# Altium PCB KeeWatch.PcbDoc (part 1 of 2)
Units mm, origin at the board's own origin, x right, y up, seen from the top; angles counter-clockwise.
Board outline 34.5 x 38.7 mm, 4 copper layers (Top Layer, Signal Layer 1, Signal Layer 2, Bottom Layer), stack 1.641 mm thick; 86 components, 93 nets, 417 pads, 196 vias.
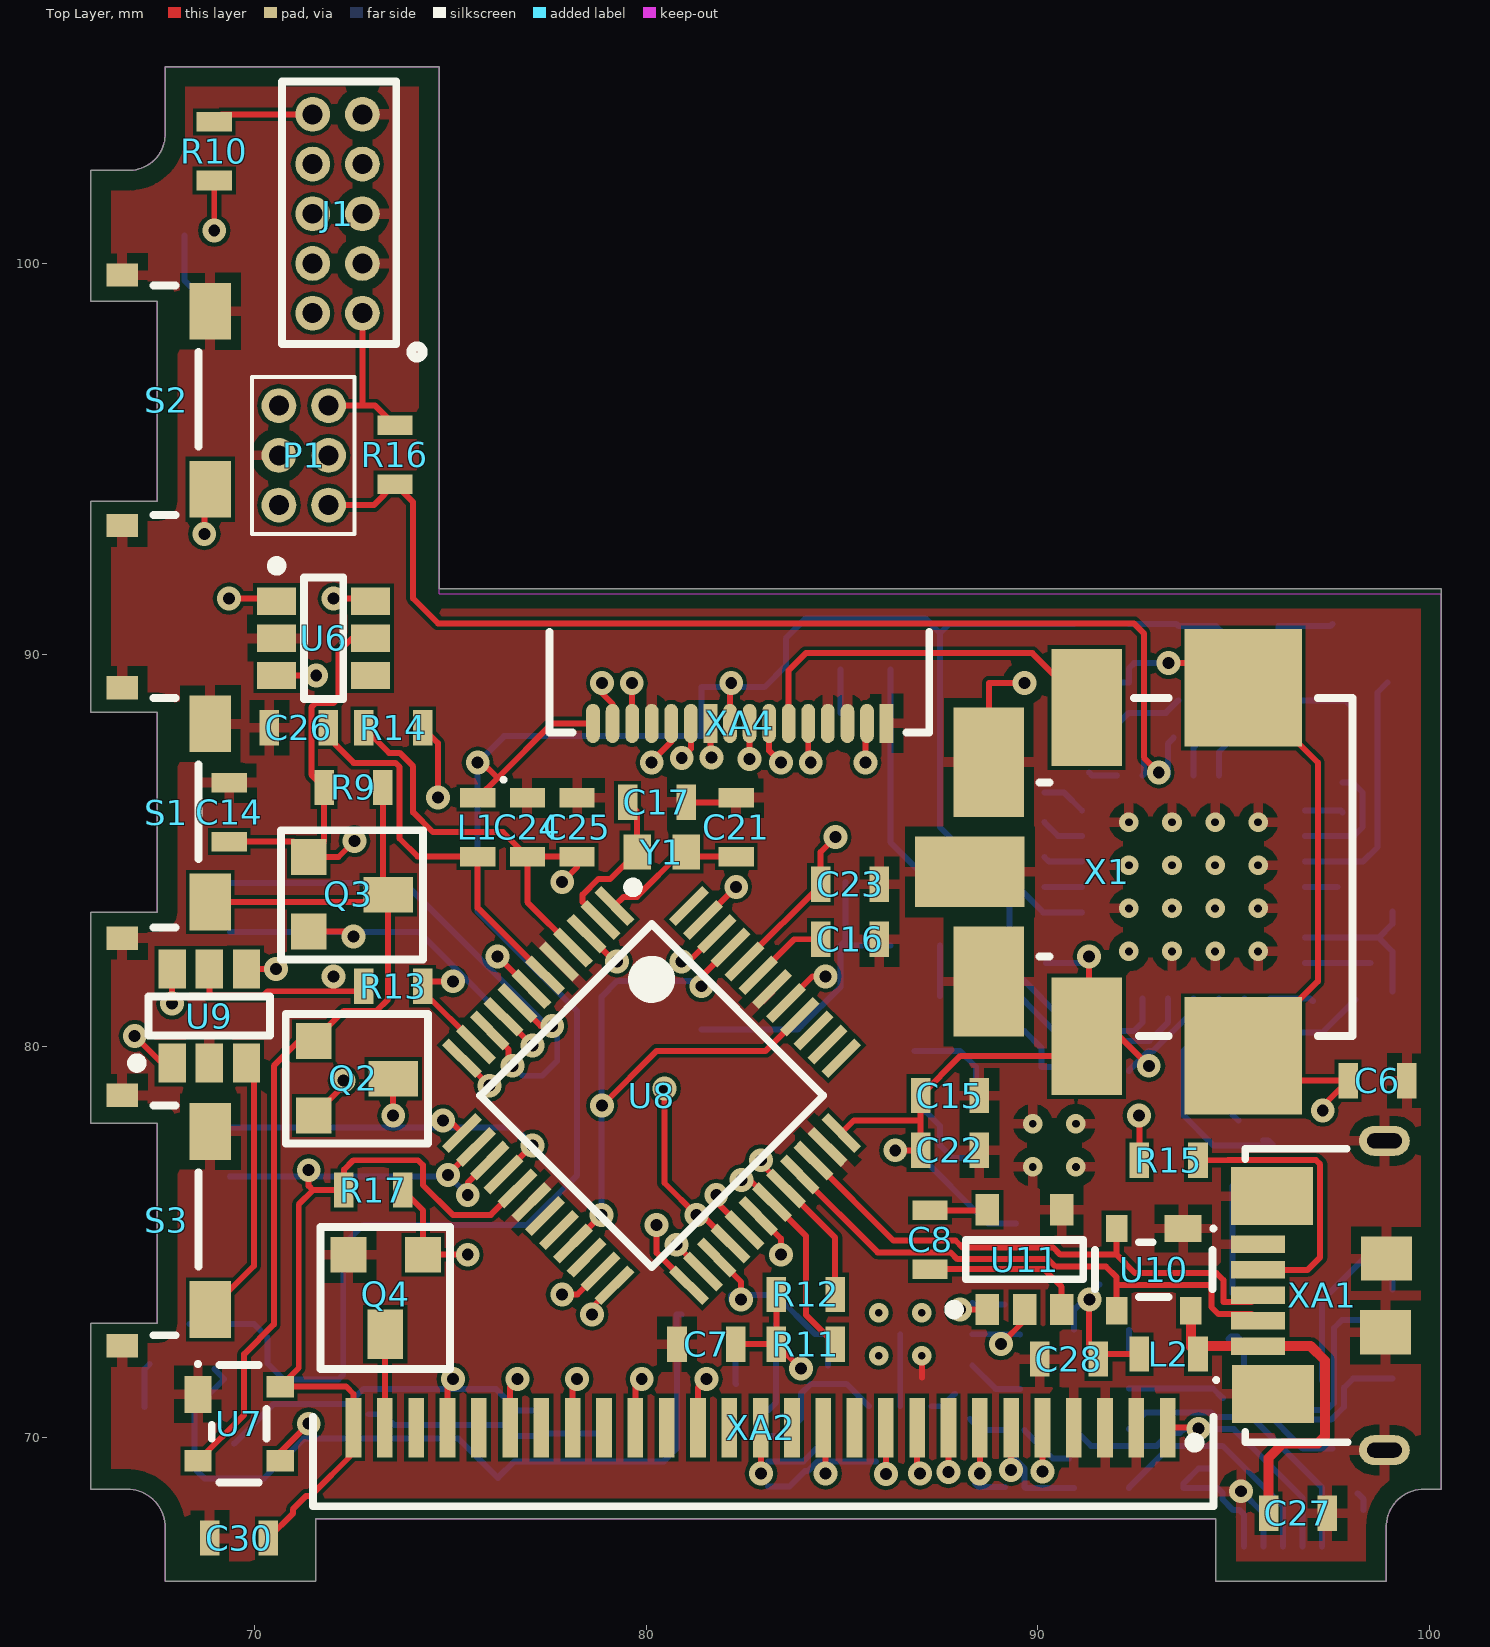
[diagram p0: Top Layer view]
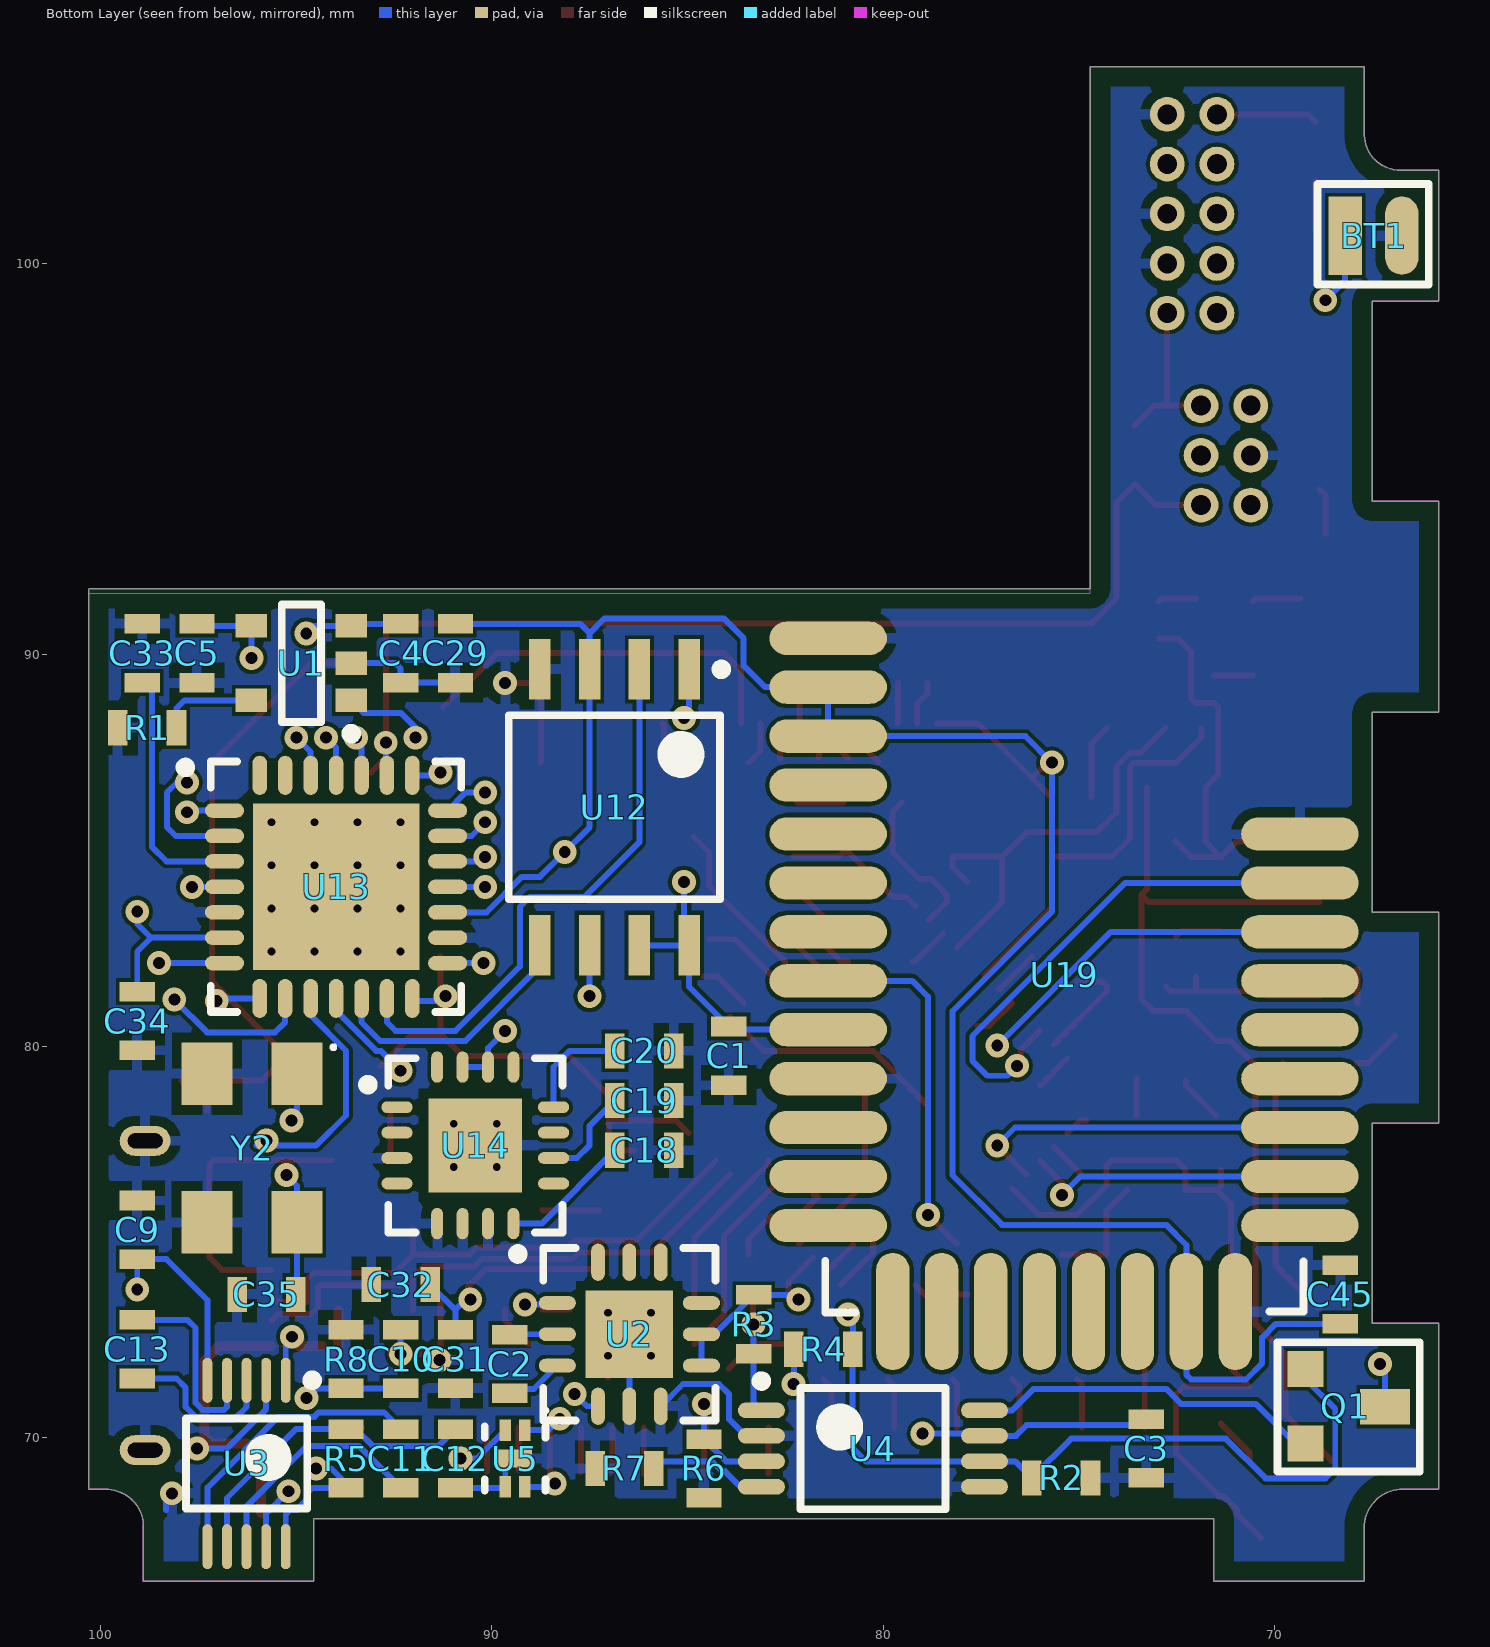
[diagram p1: Bottom Layer view, seen from below]
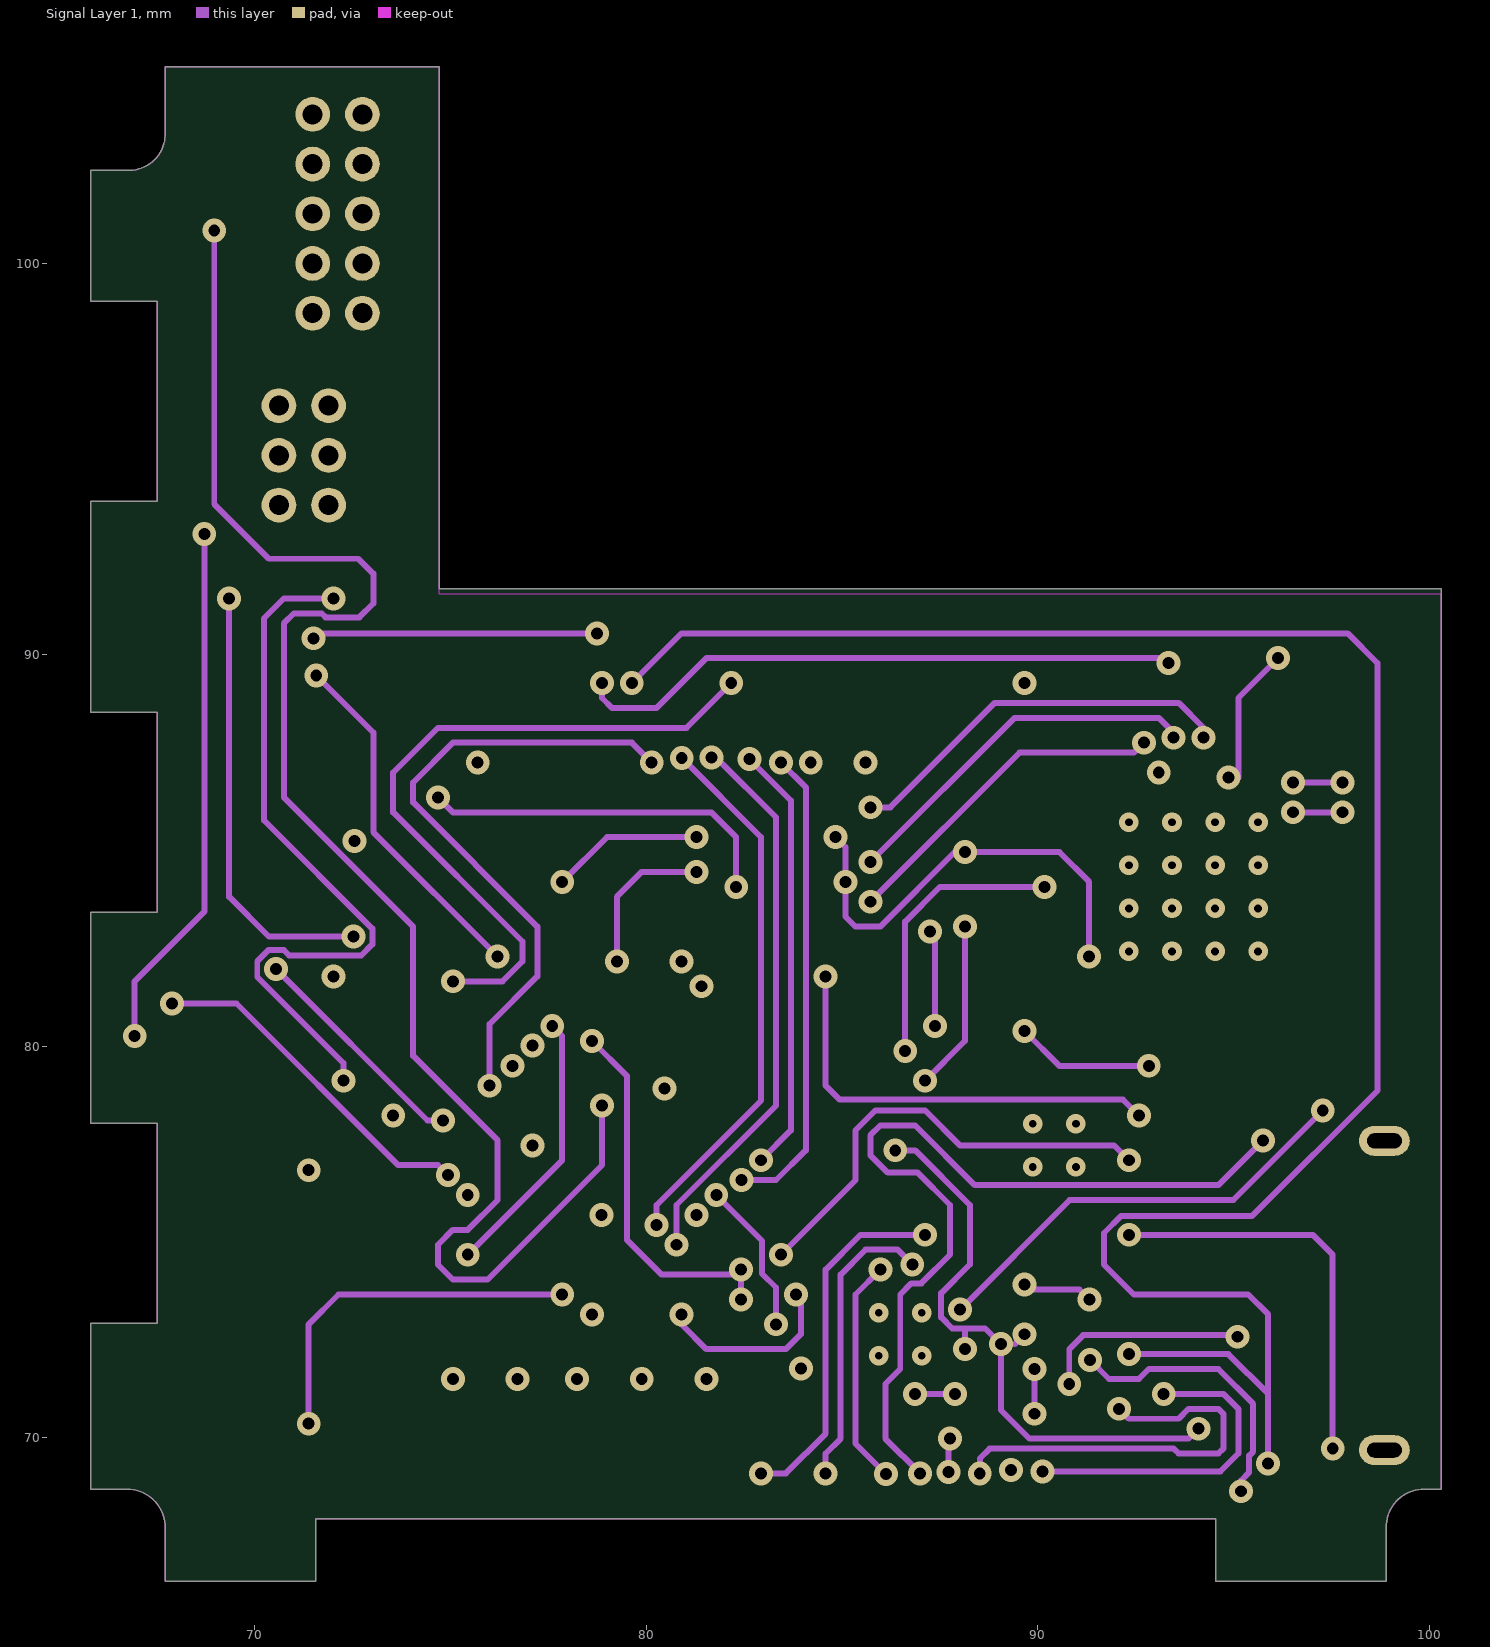
[diagram p2: Signal Layer 1]
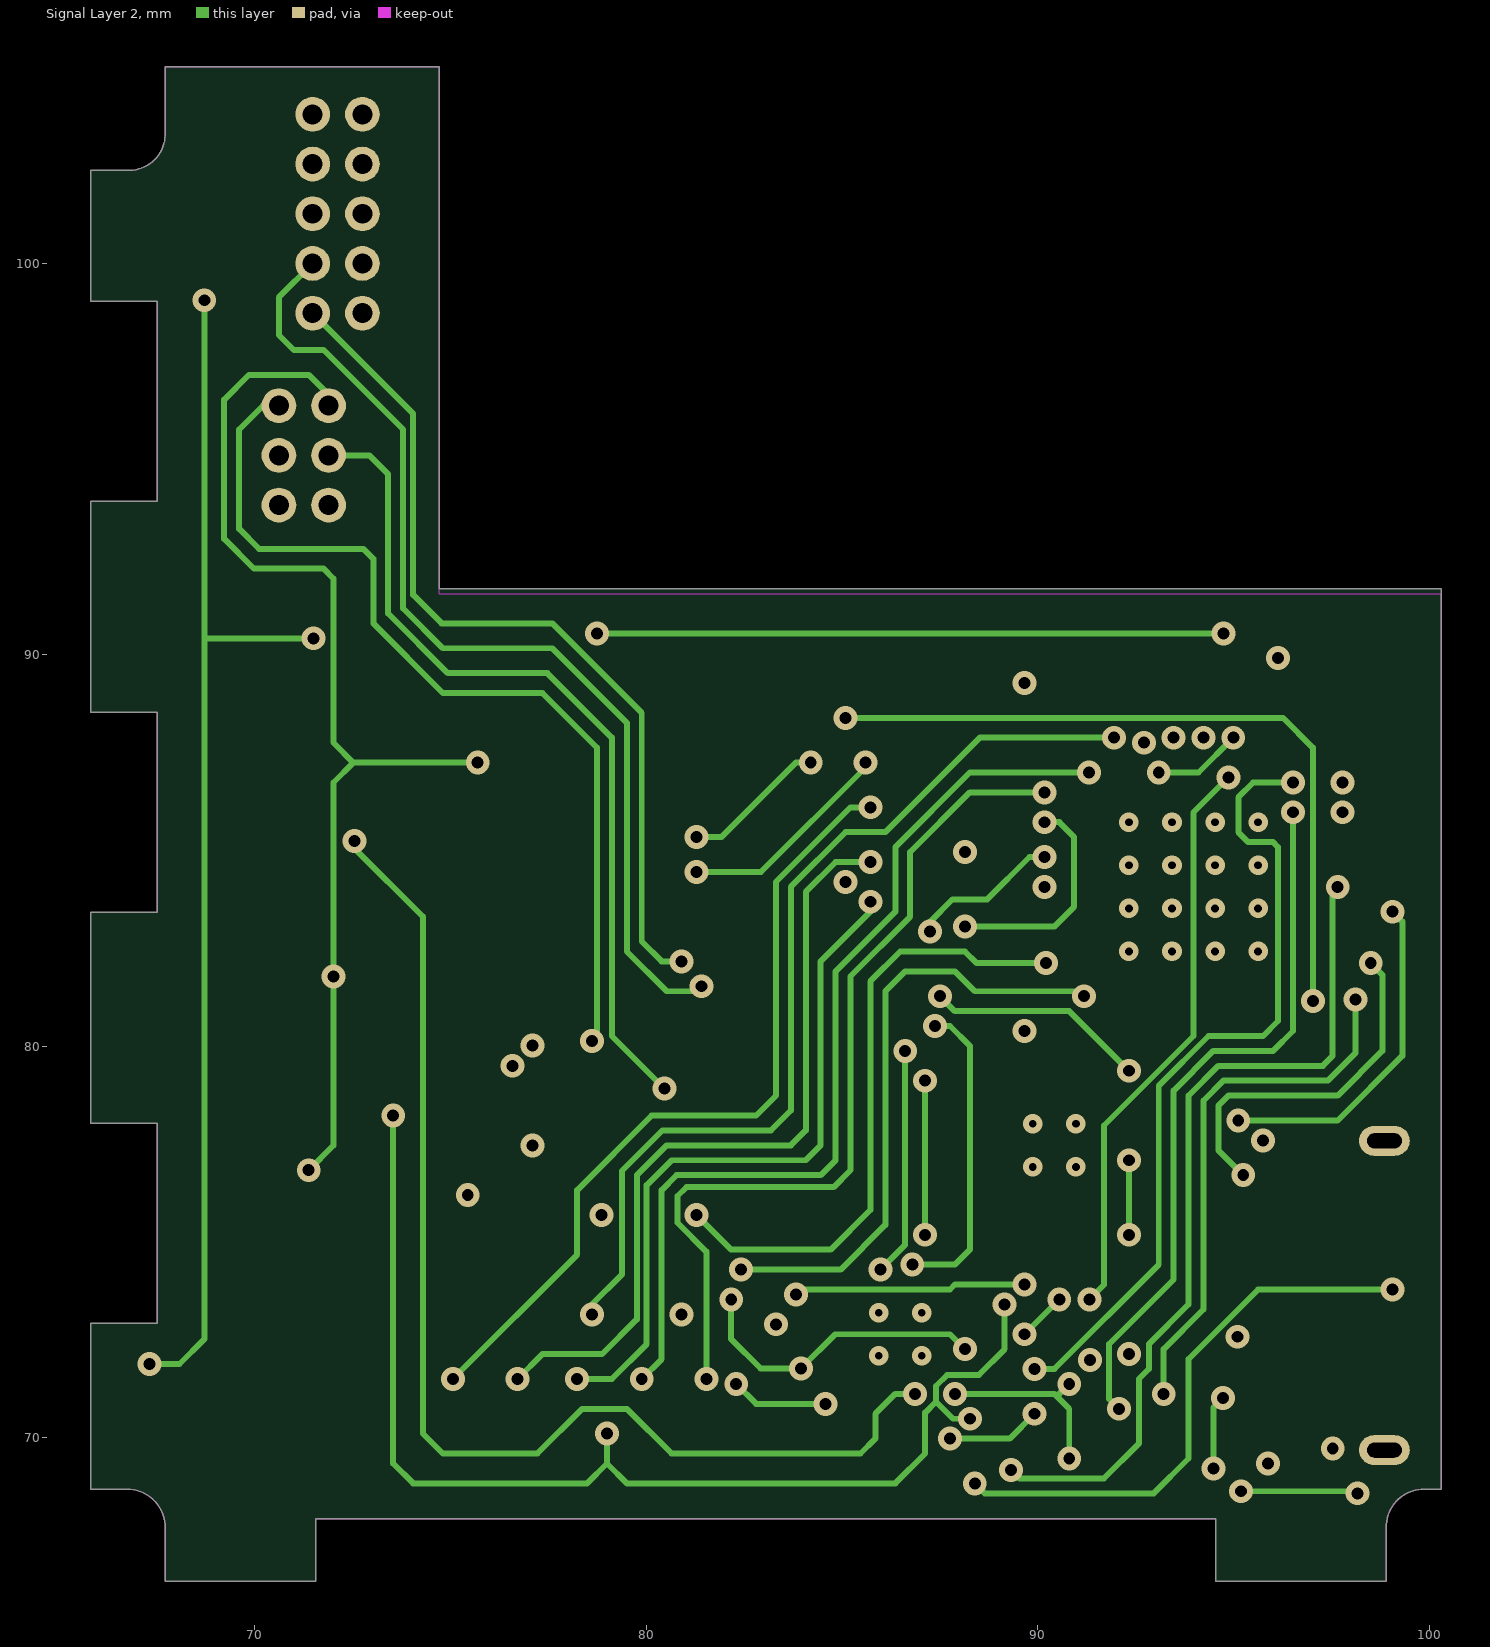
[diagram p3: Signal Layer 2]
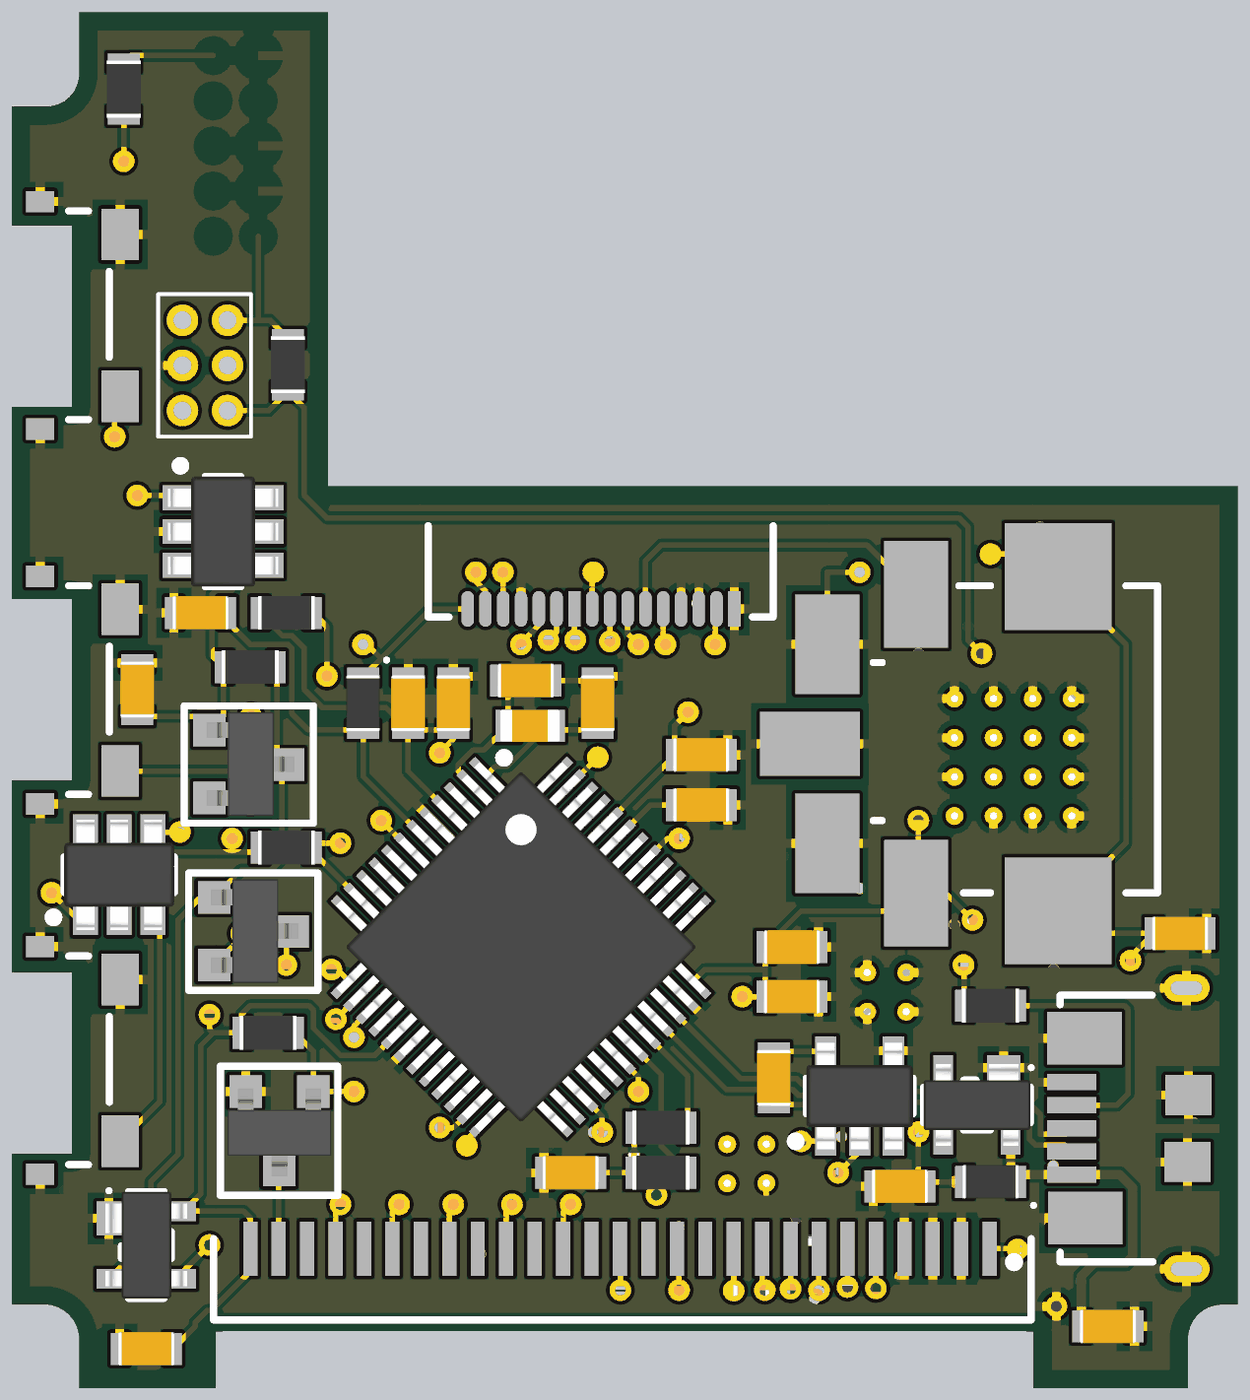
[diagram p5: 3D render of the assembled board from above, using the file's embedded part models]
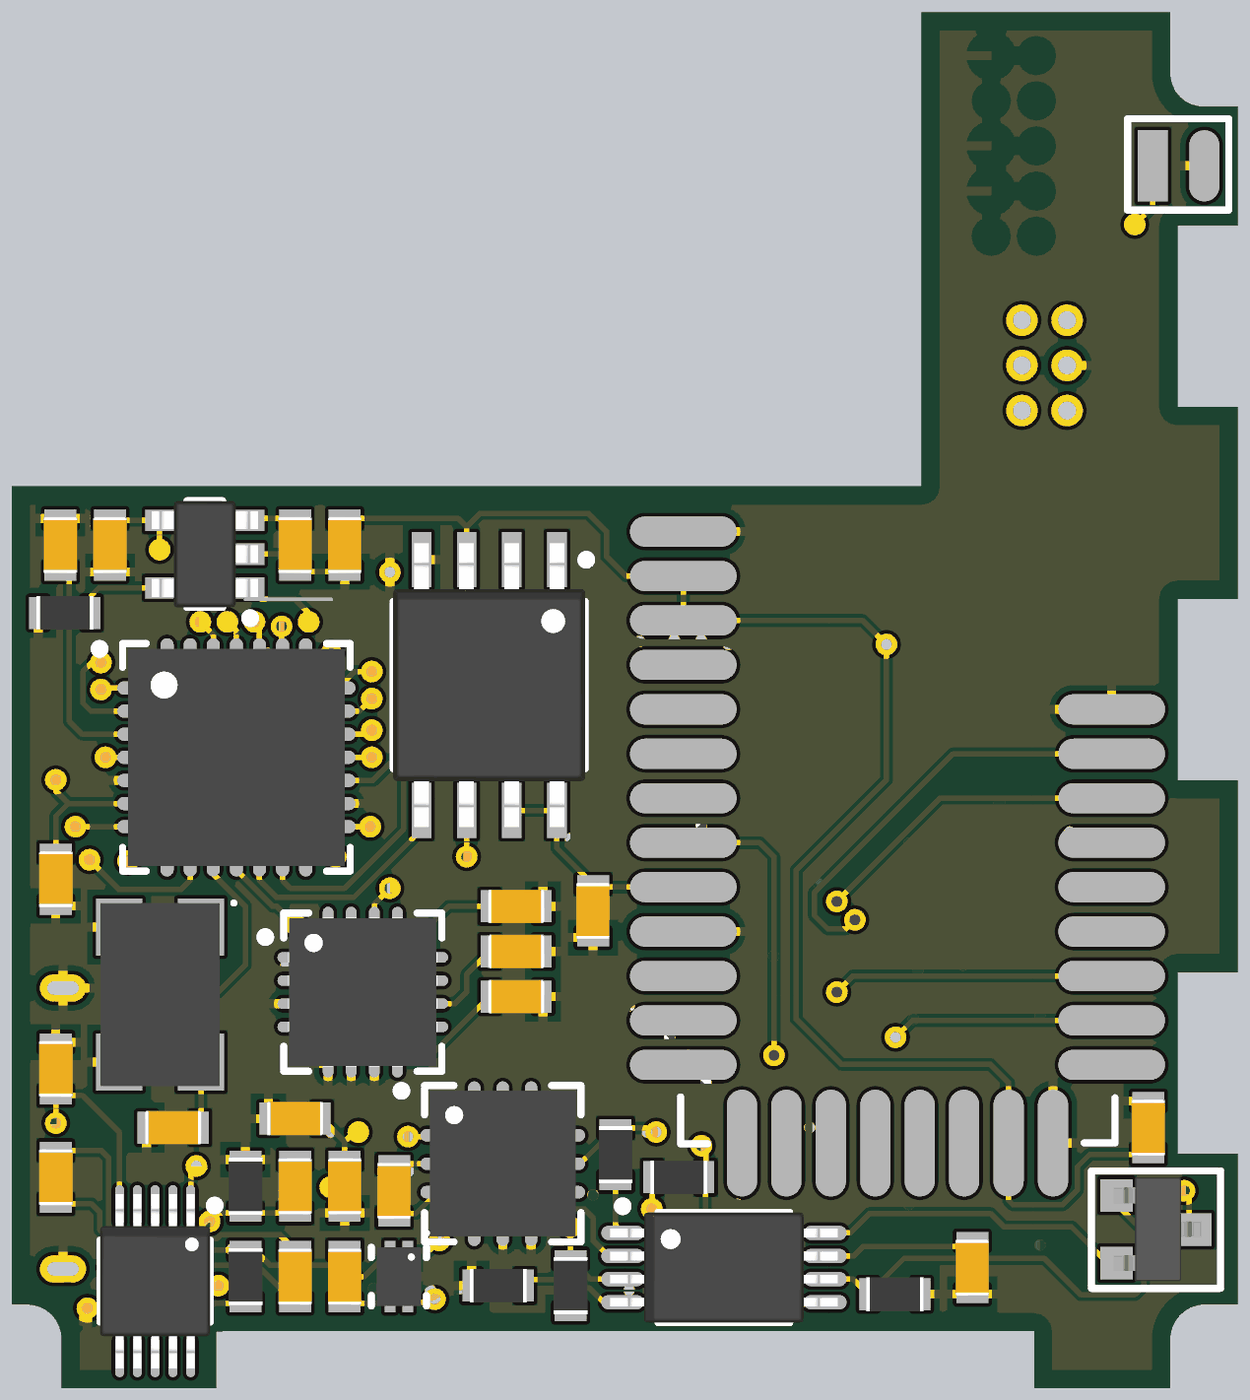
[diagram p6: 3D render of the assembled board from below, using the file's embedded part models]

## Layer stack, top to bottom
Top Solder: solder mask 0.0254, Solder Resist, Dk 3.5
Top Layer: signal copper 0.0356
Dielectric 1: core 0.1702, FR-408, Dk 4.2
Signal Layer 1: signal copper 0.0178
Dielectric 3: prepreg 1.1938, FR-408, Dk 4.2
Signal Layer 2: signal copper 0.0178
Dielectric 2: core 0.1702, FR-408, Dk 4.2
Bottom Layer: signal copper 0.0356
Bottom Solder: solder mask 0.0254, Solder Resist, Dk 3.5

## Board outline
65.807,68.685 65.807,72.93 67.507,72.93 67.507,78.03 65.807,78.03 65.807,83.43 67.507,83.43 67.507,88.53 65.807,88.53 65.807,93.93 67.507,93.93 67.507,99.03 65.807,99.03 65.807,102.38 66.807,102.38 ccw(c66.785,103.302) 67.707,103.28 67.707,105.03 74.707,105.03 74.707,91.694 100.302,91.694 100.302,68.68 99.802,68.68 ccw(c99.857,67.725) 98.902,67.78 98.902,66.33 94.552,66.33 94.552,67.93 71.552,67.93 71.552,66.33 67.707,66.33 67.707,67.78 ccw(c66.722,67.699) 66.807,68.685

## Design rules (kind name [scope] priority, off if disabled: settings)
BoardOutlineClearance [All] p1: gap=0.508
Clearance [All] p1: gap=0.102 except(0.381: Arc-Region Track-Region SMDPad-Region THPad-Region Via-Region Fill-Region Poly-Region Region-Region)
DiffPairsRouting [All] p1: maxlimit=0.254 minlimit=0.102 mostfreqgap=0.152 toplayer_minwidth=0.102 toplayer_maxwidth=0.254 toplayer_prefwidth=0.152 midlayer1_minwidth=0.102 midlayer1_maxwidth=0.254 midlayer1_prefwidth=0.152 midlayer2_minwidth=0.102 midlayer2_maxwidth=0.254 midlayer2_prefwidth=0.152 bottomlayer_minwidth=0.102 bottomlayer_maxwidth=0.254 bottomlayer_prefwidth=0.152 maxuncoupledlength=25.4
HoleSize [All] p1: absolutevalues=TRUE maxlimit=6.3 minlimit=0.305 maxpercent=80.000 minpercent=20.000
HoleToHoleClearance [All] p1: gap=0.457 allowstackedmicrovias=TRUE
MinimumAnnularRing [All] p1: minimumring=0.15
MinimumSolderMaskSliver [All] p1: minsoldermaskwidth=0.01
PolygonConnect [All] p1: connectstyle=Relief reliefconductorwidth=0.254 reliefentries=4 polygonreliefangle="90 Angle" airgapwidth=0.254
RoutingVias [All] p1: holewidth=0.305 width=0.61 viastyle="Through Hole" minholewidth=0.305 minwidth=0.61 maxholewidth=0.305 maxwidth=0.61
SMDEntry [All] p1: side=TRUE corner=TRUE anyangle=TRUE
SMDNeckDown [All] p1: percent=100.000
SMDToCorner [All] p1: distance=0
SMDToPlane [All] p1: distance=0
ShortCircuit [All] p1: allowed=TRUE
SolderMaskExpansion [All] p1: expansion=0.102
ViasUnderSMD [All] p1: allowed=TRUE
Width [All] p1: maxlimit=0.254 minlimit=0.102 preferedwidth=0.152
25 further rules are at their usual default settings.

## Classes and differential pairs
component class U_KeeWatch_SAMD21: C15 C16 C17 C18 C19 C20 C21 C22 C23 C24 C25 C26 C27 C28 J1 L1 L2 R10 R11 R12 R13 R14 R15 S2 S3 U8 U9 U10 U14 XA1 Y1
component class U_KeeWatch_Power_Supply: BT1 C1 C2 C3 C4 C5 C6 C7 C8 C9 C10 C11 C12 C13 C14 Q1 Q2 Q3 R1 R2 R3 R4 R5 R6 R7 R8 R9 S1 U1 U2 U3 U4 U5 U6 U7 U11
component class U_KeeWatch_LCD: C29 C30 C31 C32 C33 C34 C35 P1 Q4 R16 R17 U12 U13 XA2 Y2
component class KeeWatch_Top_Level: C45 U19 X1 XA4
differential pair TARGET_USB: +TARGET_USB_P -TARGET_USB_N

## Components (designator, comment, footprint, x,y, rotation, side; value= is the part's Value field where it differs from the comment)
BT1 "Battery Connector" "Battery Connector" 68.199,100.711 r180 bottom
C1 "2u2" 0603-Cap 83.947,79.756 r270 bottom
C2 "0.47u" 0603-Cap 89.543,71.882 r270 bottom
C3 "2u2" 0603-Cap 73.279,69.723 r270 bottom
C4 "4u7" 0603-Cap 92.329,90.043 r90 bottom
C5 "4u7" 0603-Cap 97.536,90.043 r270 bottom
C6 "0.33u" 0603-Cap 98.679,79.121 r0 top
C7 "0.33u" 0603-Cap 81.534,72.39 r180 top
C8 "0.33u" 0603-Cap 87.249,75.057 r90 top
C9 "2u2" 0603-Cap 99.06,75.311 r90 bottom
C10 "0.01n" 0603-Cap 92.329,72.009 r90 bottom
C11 "0.22u" 0603-Cap 92.329,69.469 r90 bottom
C12 "4u7" 0603-Cap 90.932,69.469 r90 bottom
C13 "0.22u" 0603-Cap 99.06,72.263 r270 bottom
C14 "100u" 0603-Cap 69.342,85.979 r90 top
C15 "0.1u" 0603-Cap 87.757,78.74 r0 top
C16 "1u" 0603-Cap 85.205,82.735 r0 top
C17 "22p" 0603-Cap 80.272,86.233 r0 top
C18 "0.1u" 0603-Cap 86.106,77.343 r0 bottom
C19 "0.1u" 0603-Cap 86.106,78.613 r180 bottom
C20 "0.1u" 0603-Cap 86.106,79.883 r180 bottom
C21 "22p" 0603-Cap 82.296,85.598 r90 top
C22 "0.1u" 0603-Cap 87.757,77.343 r0 top
C23 "0.1u" 0603-Cap 85.205,84.143 r0 top
C24 "4u7" 0603-Cap 76.962,85.598 r270 top
C25 "0.1u" 0603-Cap 78.232,85.598 r270 top
C26 "0.1u" 0603-Cap 71.12,88.138 r180 top
C27 "1n" 0603-Cap 96.647,68.072 r0 top
C28 "1n" 0603-Cap 90.797,72.009 r180 top
C29 "0.1u" 0603-Cap 90.932,90.043 r270 bottom
C30 "4u7" 0603-Cap 69.596,67.437 r180 top
C31 "4u7" 0603-Cap 90.932,72.009 r270 bottom
C32 "0.1u" 0603-Cap 92.329,73.914 r0 bottom
C33 "4u7" 0603-Cap 98.933,90.043 r90 bottom
C34 "22p" 0603-Cap 99.06,80.645 r270 bottom
C35 "22p" 0603-Cap 95.758,73.66 r0 bottom
C45 "1u" 0603-Cap 68.326,73.66 r90 bottom
J1 "JTAG" "SWD CONNECTOR" 73.152,110.49 r180 top
L1 "BLM18PG471SN1" 0603-IND 75.692,85.598 r90 top
L2 "BLM18PG471SN1" 0603-IND 93.345,72.136 r0 top
P1 "Header 5" "1x5 header" 66.929,98.044 r270 top
Q1 "BSS84" SOT23-GDS 69.215,71.755 r180 bottom
Q2 "BSS84" SOT23-GDS 71.501,80.137 r0 top
Q3 "BSS84" SOT23-GDS 71.374,84.836 r0 top
Q4 "BSS138L" SOT23-GDS 74.295,74.676 r270 top
R1 "2k" 0603-RES 98.806,88.138 r0 bottom
R2 "100k" 0603-RES 75.455,68.973 r180 bottom
R3 "100k" 0603-RES 83.312,72.898 r270 bottom
R4 "100k" 0603-RES 81.534,72.263 r0 bottom
R5 "150k" 0603-RES 93.726,69.469 r270 bottom
R6 "100k" 0603-RES 84.582,69.215 r270 bottom
R7 "1k" 0603-RES 86.614,69.215 r0 bottom
R8 "120k" 0603-RES 93.726,72.009 r270 bottom
R9 "100k" 0603-RES 72.517,86.614 r0 top
R10 "330R" 0603-RES 68.961,102.87 r270 top
R11 "4k7" 0603-RES 84.074,72.39 r0 top
R12 "4k7" 0603-RES 84.074,73.66 r0 top
R13 "4k7" 0603-RES 73.533,81.534 r0 top
R14 "0R" 0603-RES 73.533,88.138 r0 top
R15 "330R" 0603-RES 93.345,77.089 r180 top
R16 "4k7" 0603-RES 73.577,95.115 r90 top
R17 "2k2" 0603-RES 73.025,76.327 r0 top
S1 "EVQP40B3M" EVQP4 66.802,88.392 r270 top
S2 "EVQP40B3M" EVQP4 66.802,98.933 r270 top
S3 "EVQP40B3M" EVQP4 66.802,77.978 r270 top
U1 "MCP73832T-2DCI/OT" SOT-23-OT5_N 94.869,89.789 r0 bottom
U2 "MAX1595ETC33+" TQFN12 86.487,72.644 r180 bottom
U3 "TPS60500DGS" TI-DGS10_N 96.266,69.342 r270 bottom
U4 "TPS2115APWR" TSSOP-8 80.264,69.723 r180 bottom
U5 "SIP32401ADNP-T1GE4" TDFN4 89.408,69.469 r270 bottom
U6 "MAX16054AZT+T" Z6+1_N 71.755,90.424 r0 top
U7 "MAX6816EUS-T" SOT143B 69.596,70.358 r0 top
U8 "ATSAMD21G18A-AU" 48AA_N 80.137,78.74 r315 top
U9 "MAX6817EUT-T" Z6+1_N 68.834,80.772 r90 top
U10 "PRTR5V0U2X" SOT143B 92.964,74.295 r270 top
U11 "MAX871EUK+T" SOT-23-OT5_N 89.662,74.549 r90 top
U12 "AT25DF641A-SH-T" SO8_N 86.868,86.106 r270 bottom
U13 "GOLDELOX" 4DS-QFN-3700X3700-28_V 93.98,84.074 r180 bottom
U14 "ADXL335BCPZ" ADI-CP-16-14_N 90.424,77.47 r180 bottom
U19 "BLE112-A-V1" BLE112-A-V1 81.407,90.424 r180 bottom
X1 "SJ1-42534-SMT" AUDIO_JACK 96.647,84.836 r180 top
XA1 "USB Micro-AB" "MICRO USB B" 97.536,74.676 r180 top
XA2 "4DLCD-144 Connector" "4DLCD-144 27-pin Connector" 89.281,70.231 r270 top
XA4 "0.5mm FPC" "16-PIN CONNECTOR" 86.137,88.249 r180 top
Y1 "32.768kHz" "32.768KHZ CRYSTAL" 80.391,84.963 r180 top
Y2 "ABM3C-12.000MHZ-D4Y-T" CRYSTAL 96.127,77.401 r270 bottom

## Footprints (in the part's own frame and the unit in brackets; to place one, negate y for a bottom-side part, rotate by r counter-clockwise, add the part's x,y. Pads: shape width x height; smd on the part's side, far side on the other; paste and mask are expansions set on the pad)
"1x5 header" [mil]
  round 35 hole 20: 1(66,195) 2(66,145) 3(116,195) 4(116,145) 5(166,195) ""(166,145)
  silkscreen extent 37,118 195,221
"4DLCD-144 27-pin Connector" [mil]
  rect 60x15.75 smd: 1(-1,159) 2(-1,127.5) 3(-1,96.01) 4(-1,64.51) 5(-1,33.02) 6(-1,1.52) 7(-1,-29.98) 8(-1,-61.47) 9(-1,-92.97) 10(-1,-124.46) 11(-1,-155.96) 12(-1,-187.46) 13(-1,-218.95) 14(-1,-250.45) 15(-1,-281.94) 16(-1,-313.44) 17(-1,-344.94) 18(-1,-376.43) 19(-1,-407.93) 20(-1,-439.42) 21(-1,-470.92) 22(-1,-502.42) 23(-1,-533.91) 24(-1,-565.41) 25(-1,-596.9) 26(-1,-628.4) 27(-1,-659.88)
  silkscreen extent -12,-701 78,205
4DS-QFN-3700X3700-28_V [mm] "QFN, 28-Leads, Body 6.00x6.00mm, Pitch 0.65mm, Thermal Pad 4.25x4.25mm, IPC High Density"
  oval 1x0.37 smd: 1(-2.85,1.95) 2(-2.85,1.3) 3(-2.85,0.65) 4(-2.85,0) 5(-2.85,-0.65) 6(-2.85,-1.3) 7(-2.85,-1.95) 15(2.85,-1.95) 16(2.85,-1.3) 17(2.85,-0.65) 18(2.85,0) 19(2.85,0.65) 20(2.85,1.3) 21(2.85,1.95)
  oval 0.37x1 smd: 8(-1.95,-2.85) 9(-1.3,-2.85) 10(-0.65,-2.85) 11(0,-2.85) 12(0.65,-2.85) 13(1.3,-2.85) 14(1.95,-2.85) 22(1.95,2.85) 23(1.3,2.85) 24(0.65,2.85) 25(0,2.85) 26(-0.65,2.85) 27(-1.3,2.85) 28(-1.95,2.85)
  rect 4.25x4.25 smd: 29(0,0)
  silkscreen extent -3.98,-3.2 3.2,3.2, body extent -3.05,-3.05 3.05,3.05, height 1
"16-PIN CONNECTOR" [mm]
  rect 0.35x1 smd: 1(0,0) 10(4.5,0)
  oval 0.35x1 smd: 2(0.5,0) 3(1,0) 4(1.5,0) 5(2,0) 6(2.5,0) 7(3,0) 8(3.5,0) 9(4,0) 11(5,0) 12(5.5,0) 13(6,0) 14(6.5,0) 15(7,0) 16(7.5,0)
  silkscreen extent -1.09,-2.34 8.61,0.23, body extent -1.12,-3.3 8.61,0.23, height 1
"32.768KHZ CRYSTAL" [mm] "Crystal, 2-Leads, Body 1.60x0.86mm, IPC High Density"
  rect 0.7x0.9 smd: 1(-0.625,0) 2(0.625,0)
  body extent -0.85,-0.46 0.85,0.46, height 0.5
48AA_N [mm] "TSQFP, 48-Leads, Body 7.00x7.00mm, Pitch 0.50mm, IPC High Density"
  rect 1.2x0.25 smd: 1(-4.1,2.75) 2(-4.1,2.25) 3(-4.1,1.75) 4(-4.1,1.25) 5(-4.1,0.75) 6(-4.1,0.25) 7(-4.1,-0.25) 8(-4.1,-0.75) 9(-4.1,-1.25) 10(-4.1,-1.75) 11(-4.1,-2.25) 12(-4.1,-2.75) 25(4.1,-2.75) 26(4.1,-2.25) 27(4.1,-1.75) 28(4.1,-1.25) 29(4.1,-0.75) 30(4.1,-0.25) 31(4.1,0.25) 32(4.1,0.75) 33(4.1,1.25) 34(4.1,1.75) 35(4.1,2.25) 36(4.1,2.75)
  rect 0.25x1.2 smd: 13(-2.75,-4.1) 14(-2.25,-4.1) 15(-1.75,-4.1) 16(-1.25,-4.1) 17(-0.75,-4.1) 18(-0.25,-4.1) 19(0.25,-4.1) 20(0.75,-4.1) 21(1.25,-4.1) 22(1.75,-4.1) 23(2.25,-4.1) 24(2.75,-4.1) 37(2.75,4.1) 38(2.25,4.1) 39(1.75,4.1) 40(1.25,4.1) 41(0.75,4.1) 42(0.25,4.1) 43(-0.25,4.1) 44(-0.75,4.1) 45(-1.25,4.1) 46(-1.75,4.1) 47(-2.25,4.1) 48(-2.75,4.1)
  silkscreen extent -4.22,-3.1 3.1,3.55, body extent -4.5,-4.5 4.5,4.5, height 1.2
0603-Cap [mm] "Chip Capacitor, 2-Leads, Body 1.55x0.85mm, IPC High Density"
  rect 0.5x0.9 smd: 1(-0.75,0) 2(0.75,0)
  body extent -0.8,-0.48 0.8,0.47, height 0.5
0603-IND [mm] "Chip Inductor, 2-Leads, Body 1.55x0.85mm, IPC High Density"
  rect 0.5x0.9 smd: 1(-0.75,0) 2(0.75,0)
  silkscreen extent 1.16,-0.71 1.26,-0.61, body extent -0.8,-0.48 0.8,0.48, height 0.5
0603-RES [mm] "Chip Resistor, 2-Leads, Body 1.55x0.85mm, IPC High Density"
  rect 0.5x0.9 smd: 1(-0.75,0) 2(0.75,0)
  body extent -0.8,-0.48 0.8,0.47, height 0.5
ADI-CP-16-14_N [mm] "QFN, 16-Leads, Body 4x4mm, Pitch 0.65mm, Thermal Pad 2.4x2.4mm, IPC Medium Density"
  oval 0.8x0.3 smd: 1(-2,0.975) 2(-2,0.325) 3(-2,-0.325) 4(-2,-0.975) 9(2,-0.975) 10(2,-0.325) 11(2,0.325) 12(2,0.975)
  oval 0.3x0.8 smd: 5(-0.975,-2) 6(-0.325,-2) 7(0.325,-2) 8(0.975,-2) 13(0.975,2) 14(0.325,2) 15(-0.325,2) 16(-0.975,2)
  rect 2.4x2.4 smd: 17(0,0)
  silkscreen extent -2.87,-2.22 2.22,2.22, body extent -2.1,-2.1 2.1,2.09, height 1.5
AUDIO_JACK [mm]
  rect 2.8x1.8 smd: 1(8.382,0.381)
  rect 1.8x3 smd: 2(5.397,-3.82) 3(5.397,4.58)
  rect 3x3 smd: 4(1.397,-4.32) 5(1.397,5.08)
  rect 1.8x2.8 smd: 6(7.897,-2.42) 7(7.897,3.18)
  silkscreen extent -1.4,-4.06 6.6,4.57, body extent -1.4,-4.06 8.38,4.57, height 4.5
"Battery Connector" [mm]
  rect 0.85x2 smd: 1(0,0)
  oval 0.85x2 smd: 2(1.448,0)
  silkscreen extent -0.71,-1.24 2.13,1.32
BLE112-A-V1 [mm]
  oval 3x0.85 smd: 1(0,0) 2(0,-1.25) 3(0,-2.5) 4(0,-3.75) 5(0,-5) 6(0,-6.25) 7(0,-7.5) 8(0,-8.75) 9(0,-10) 10(0,-11.25) 11(0,-12.5) 12(0,-13.75) 13(0,-15) 22(12.05,-15) 23(12.05,-13.75) 24(12.05,-12.5) 25(12.05,-11.25) 26(12.05,-10) 27(12.05,-8.75) 28(12.05,-7.5) 29(12.05,-6.25) 30(12.05,-5)
  oval 0.85x3 smd: 14(1.65,-17.2) 15(2.9,-17.2) 16(4.15,-17.2) 17(5.4,-17.2) 18(6.65,-17.2) 19(7.9,-17.2) 20(9.15,-17.2) 21(10.4,-17.2)
  silkscreen extent -0.08,-17.22 12.14,-15.9, body extent 0.05,-17.2 12.12,1.4, height 2.3
CRYSTAL [mm] "DFN, 4-Leads, Body 3.20x5.00mm, Pitch 3.70mm, IPC High Density"
  rect 1.6x1.3 smd: 1(-1.9,1.15) 2(1.9,1.15) 3(1.9,-1.15) 4(-1.9,-1.15)
  silkscreen extent -2.62,2.02 -2.53,2.12, body extent -2.57,-1.68 2.68,1.67, height 0.05
EVQP4 [mm]
  rect 1.45x1.05 smd: 1(0.152,2.057) 2(4.702,2.057)
  rect 0.6x0.8 smd: ""(-0.773,-0.194) ""(5.627,-0.194)
  silkscreen extent -0.51,0.61 5.36,1.75, body extent -0.38,-1.07 5.31,1.52, height 1.35
"MICRO USB B" [mm]
  rect 1.38x0.45 smd: 1(1.905,2.337) 2(1.905,1.687) 3(1.905,1.037) 4(1.905,0.387) 5(1.905,-0.263)
  rect 1.3x1.125 smd: ""(-1.372,0.102) ""(-1.346,1.981)
  oval 1.3x0.762 hole 0.381 slot 0.889 at 0 deg: ""(-1.321,4.991) ""(-1.321,-2.909)
  rect 2.1x1.475 smd: ""(1.524,3.556) ""(1.549,-1.499)
  silkscreen extent -0.38,-2.71 2.24,4.79, body extent -2.77,-2.72 2.24,4.78, height 2.45
SO8_N [mm] "SOIC, 8-Leads, Body 5.24x5.29mm, Pitch 1.27mm, IPC High Density"
  rect 1.55x0.55 smd: 1(-3.525,1.905) 2(-3.525,0.635) 3(-3.525,-0.635) 4(-3.525,-1.905) 5(3.525,-1.905) 6(3.525,-0.635) 7(3.525,0.635) 8(3.525,1.905)
  silkscreen extent -3.65,-2.7 2.35,2.85, body extent -3.99,-2.7 3.99,2.7, height 2.16
SOT23-GDS [mil]
  rect 36x36 smd: 1(0,0) 3(0,-75)
  rect 50x36 smd: 2(80,-38)
  silkscreen extent -28,-103 115,27, body extent -3,-95 94,20, height 41
SOT143B [mm] "SOT143, 4-Leads, Body 2.90x2.30mm, Pitch 1.90mm, IPC High Density"
  rect 0.7x0.95 smd: 1(-1.05,0.75)
  rect 0.7x0.55 smd: 2(-1.05,-0.95) 3(1.05,-0.95) 4(1.05,0.95)
  silkscreen extent -1.1,-1.5 0.7,1.57, body extent -1.15,-1.5 1.15,1.5, height 1.1
SOT-23-OT5_N [mm] "SOT23, 5-Leads, Body 2.90x2.80mm, Pitch 0.95mm, IPC High Density"
  rect 0.8x0.6 smd: 1(-1.275,0.95) 2(-1.275,0) 3(-1.275,-0.95) 4(1.275,-0.95) 5(1.275,0.95)
  silkscreen extent -1.4,-1.5 0.5,1.92, body extent -1.5,-1.5 1.5,1.5, height 1.45
"SWD CONNECTOR" [mil]
  round 35 hole 20: 1(16,463) 2(66,463) 3(16,413) 4(66,413) 5(16,363) 6(66,363) 7(16,313) 8(66,313) 9(16,263) 10(66,263)
  silkscreen extent -45,230 97,508
TDFN4 [mm] "SON, 4-Leads, Body 1.20x1.60mm, Pitch 0.50mm, Thermal Pad 0.86x0.46mm, IPC High Density"
  rect 0.55x0.3 smd: 1(-0.725,0.25) 2(-0.725,-0.25) 3(0.725,-0.25) 4(0.725,0.25)
  rect 0.46x0.86 smd: 5(0,0)
  silkscreen extent -1.27,-0.78 0.82,0.82, body extent -0.83,-0.63 0.83,0.62, height 0.6
TI-DGS10_N [mm] "TSSOP, 10-Leads, Body 3.00x3.00mm, Pitch 0.50mm, IPC High Density"
  oval 1.15x0.25 smd: 1(-2.125,1) 2(-2.125,0.5) 3(-2.125,0) 4(-2.125,-0.5) 5(-2.125,-1) 6(2.125,-1) 7(2.125,-0.5) 8(2.125,0) 9(2.125,0.5) 10(2.125,1)
  silkscreen extent -2.25,-1.55 1.15,1.8, body extent -2.45,-1.55 2.45,1.55, height 1.1
TQFN12 [mm] "QFN, 12-Leads, Body 4.00x4.00mm, Pitch 0.80mm, Thermal Pad 2.23x2.23mm, IPC High Density"
  oval 0.95x0.35 smd: 1(-1.84,0.8) 2(-1.84,0) 3(-1.84,-0.8) 7(1.84,-0.8) 8(1.84,0) 9(1.84,0.8)
  oval 0.35x0.95 smd: 4(-0.8,-1.84) 5(0,-1.84) 6(0.8,-1.84) 10(0.8,1.84) 11(0,1.84) 12(-0.8,1.84)
  rect 2.23x2.23 smd: 13(0,0)
  silkscreen extent -2.98,-2.2 2.2,2.2, body extent -2.05,-2.05 2.05,2.05, height 0.8
TSSOP-8 [mm] "TSOP, 8-Leads, Body 3.00x4.40mm, Pitch 0.65mm, IPC High Density"
  oval 1.2x0.4 smd: 1(-2.85,0.975) 2(-2.85,0.325) 3(-2.85,-0.325) 4(-2.85,-0.975) 5(2.85,-0.975) 6(2.85,-0.325) 7(2.85,0.325) 8(2.85,0.975)
  silkscreen extent -2.98,-1.55 1.85,1.85, body extent -3.2,-1.55 3.2,1.55, height 1.2
Z6+1_N [mm] "SOT23, 6-Leads, Body 2.90x2.80mm, Pitch 0.95mm, IPC High Density"
  rect 1x0.7 smd: 1(-1.2,0.95) 2(-1.2,0) 3(-1.2,-0.95) 4(1.2,-0.95) 5(1.2,0) 6(1.2,0.95)
  silkscreen extent -1.32,-1.55 0.5,1.97, body extent -1.55,-1.55 1.55,1.55, height 1.4

## Part data
BT1: "3.7V 250maH Battery Connector"
C1 C2 C3 C4 C5 C6 C7 C8 C9 C10 C11 C12 C13 C14 C15 C16 C17 C18 C19 C20 C21 C22 C23 C24 C25 C26 C27 C28 C29 C30 C31 C32 C33 C34 C35 C45: library part 0603-Cap, "CAPACITOR 0603 CERAMIC"
J1: "JTAG CONNECTOR"
L1 L2: library part 0603FB-1KZ, "FERRITE BEAD 1000 OHM 400mA"
P1: "Header, 5-Pin"
R1 R2 R3 R4 R5 R6 R7 R8 R9 R10 R11 R12 R13 R14 R15 R16 R17: library part 0603-Res, "GENERIC RESISTOR 0603"
U1: "Miniature Single-Cell, Fully Integrated Li-Ion, Li-Polymer Charge Management Controller, 4.2V, 5-Pin SOT-23, Industrial Temperature, Tape and Reel"
U2: "Regulated 3.3V/5.0V Step-Up/Step-Down Charge Pump"
U3: "0.8 to 3.3 V, Step-Down Charge Pump Regulator, 250 mA, 1.8 to 6.5 V Input with 2-Cell Alkaline / Nixx Input, -40 to 85 degC, 10-pin SOP (DGS10), Green (RoHS & no Sb/Br)"
U4: "Auto-switching Power MUX"
U5: "1.1 V to 5.5 V, Slew Rate Controlled Load SwitcH"
U6: "On/Off Controller with Debounce and +/-15kV ESD Protection, 6-Pin SOT, -40°C to +125°C, Pb-Free, Tape and Reel"
U9: "±15kV ESD-Protected,Dual, CMOS Switch Debouncer"
U11: "Switched-Capacitor Voltage Inverters"
U12: "64-Mbit, 2.7V Minimum SPI Serial Flash Memory with Dual–I/O Support"
U13: "GOLDELOX Processor, Embedded Graphics Controller, 10 KB FLASH Memory, 510 B SRAM, 8 bits A/D Converter Resolution,  48 MHz, -40 to 80 degC, 28-Pin QFN, Tube"
U14: "Small, Low Power, 3-Axis +/-3 g Accelerometer with Analog Output, 1.6 KHz BW, Industrial, 16-pin QFN, Tray"
X1: "2.5 MM AUDIO JACK"
XA1: library part "MICRO USB B", "USB Connectors MICRO USB B RECEPT TOP MOUNT"
XA2: "4DLCD-144 27-pin Flex Connector"
XA4: "0.5mm FPC 16-pin Connector"
Y1: library part ABS05-32.768KHZ-9-T, "32.768kHz SMD LOW PROFILE CRYSTAL"
Y2: "CERAMIC SMD CRYSTAL"

## Via types
v1: diameter 0.61, hole 0.305, Top Layer to Signal Layer 1, 57 vias
v2: diameter 0.61, hole 0.305, Signal Layer 2 to Bottom Layer, 35 vias
v3: diameter 0.61, hole 0.305, Signal Layer 1 to Signal Layer 2, 34 vias
v4: diameter 0.5, hole 0.2, Top Layer to Bottom Layer, 24 vias
v5: diameter 0.61, hole 0.305, Top Layer to Signal Layer 2, 20 vias
v6: diameter 0.61, hole 0.305, Signal Layer 1 to Bottom Layer, 18 vias
v7: diameter 0.61, hole 0.305, Top Layer to Bottom Layer, 8 vias

## Nets (pads, with @x,y where several pads share a name; then routed paths per layer and width w, separated by ;. In a path a pad name is that pad's centre, name@x,y a point inside that pad or via, vN(x,y) a via of type N, cw(c..) or ccw(c..) an arc to the next point about the centre after c; other vN are vias at no path point)
CHARGE_STAT: 
CS: U13.9 XA2.5 | length 27.1
  Top Layer w0.152: v1(90.12,69.138) XA2.5@90.12,70.256
  Signal Layer 1 w0.152: v1(90.12,69.138) 94.665,69.138 95.123,69.596 95.123,70.739 94.742,71.12 v3(93.218,71.12)
  Signal Layer 2 w0.152: v3(93.218,71.12) 93.218,72.263 94.234,73.279 94.234,78.613 94.742,79.121 97.409,79.121 98.113,79.825 v2(98.113,81.193)
  Bottom Layer w0.152: U13.9@95.28,81.224 95.28,80.617 95.542,80.355 97.275,80.355 v2(98.113,81.193)
D0: U13.18 XA2.10 | length 21
  Top Layer w0.152: v1(86.12,69.074) XA2.10@86.12,70.256
  Signal Layer 1 w0.152: v3(85.979,74.295) 85.344,73.66 85.344,69.85 v1(86.12,69.074) ; v3(86.614,79.883) 86.614,83.185 87.503,84.074 v6(90.17,84.074)
  Signal Layer 2 w0.152: v3(85.979,74.295) 86.614,74.93 v3(86.614,79.883)
  Bottom Layer w0.152: v6(90.17,84.074) U13.18@91.13,84.074
D1: U13.19 XA2.12 | length 23.9
  Top Layer w0.152: XA2.12@84.52,70.256 84.582,70.194 v1(84.582,69.088)
  Signal Layer 1 w0.152: v1(84.582,69.088) 84.582,69.596 84.963,69.977 84.963,74.168 85.598,74.803 86.42,74.803 v3(86.795,74.428) ; v3(87.249,82.931) 87.376,82.804 v3(87.376,80.518)
  Signal Layer 2 w0.152: v3(86.795,74.428) 87.89,74.428 88.265,74.803 88.265,80.01 87.757,80.518 v3(87.376,80.518) ; v3(87.249,82.931) 87.249,83.185 87.82,83.757 88.709,83.757 89.789,84.836 v2(90.17,84.836)
  Bottom Layer w0.152: v2(90.17,84.836) 90.282,84.724 U13.19@91.13,84.724
D2: U13.20 XA2.14 | length 25.4
  Top Layer w0.152: XA2.14@82.92,70.256 82.931,70.245 v1(82.931,69.088)
  Signal Layer 1 w0.152: v1(82.931,69.088) 83.566,69.088 84.582,70.104 84.582,74.295 85.471,75.184 v3(87.122,75.184) ; v3(87.122,79.121) 88.138,80.137 v3(88.138,83.058)
  Signal Layer 2 w0.152: v3(87.122,75.184) v3(87.122,79.121) ; v3(88.138,83.058) 90.424,83.058 90.932,83.566 90.932,85.344 90.551,85.725 v2(90.17,85.725)
  Bottom Layer w0.152: v2(90.17,85.725) 90.521,85.374 U13.20@91.13,85.374
D3: U13.21 XA2.16 | length 25
  Top Layer w0.152: XA2.16@81.32,70.256 81.32,71.287 v5(81.534,71.501)
  Signal Layer 2 w0.152: v5(81.534,71.501) 81.534,74.756 80.797,75.492 80.797,76.175 81.026,76.403 84.785,76.403 85.217,76.835 85.217,81.788 86.741,83.312 86.741,84.963 88.265,86.487 v2(90.17,86.487)
  Bottom Layer w0.152: v2(90.17,86.487) 90.667,86.487 U13.21@91.13,86.024
D4: U13.22 XA2.18 | length 26.2
  Top Layer w0.152: XA2.18@79.72,70.256 79.72,71.338 v5(79.883,71.501)
  Signal Layer 2 w0.152: v5(79.883,71.501) 80.391,72.009 80.391,76.327 80.772,76.708 84.455,76.708 84.836,77.089 84.836,81.915 86.36,83.439 86.36,85.09 88.265,86.995 v2(91.313,86.995)
  Bottom Layer w0.152: v2(91.313,86.995) 91.384,86.924 U13.22@92.03,86.924
D5: U13.23 XA2.20 | length 28.6
  Top Layer w0.152: XA2.20@78.12,70.256 78.12,71.389 v5(78.232,71.501)
  Signal Layer 1 w0.152: v3(85.725,83.693) 89.535,87.503 92.456,87.503 v6(92.71,87.757)
  Signal Layer 2 w0.152: v5(78.232,71.501) 79.121,71.501 80.01,72.39 80.01,76.454 80.645,77.089 84.074,77.089 84.455,77.47 84.455,82.169 85.725,83.439 v3(85.725,83.693)
  Bottom Layer w0.152: U13.23@92.68,86.924 92.71,86.954 v6(92.71,87.757)
D6: U13.24 XA2.22 | length 32.1
  Top Layer w0.152: XA2.22@76.52,70.256 76.52,71.313 v5(76.708,71.501)
  Signal Layer 1 w0.152: v3(85.725,84.709) 89.408,88.392 93.091,88.392 93.472,88.011 v6(93.472,87.884)
  Signal Layer 2 w0.152: v5(76.708,71.501) 77.343,72.136 78.867,72.136 79.756,73.025 79.756,76.708 80.518,77.47 83.693,77.47 84.074,77.851 84.074,83.947 84.836,84.709 v3(85.725,84.709)
  Bottom Layer w0.152: U13.24@93.33,86.924 93.33,87.742 v6(93.472,87.884)
D7: U13.25 XA2.24 | length 33.4
  Top Layer w0.152: XA2.24@74.92,70.256 74.92,71.364 v5(75.057,71.501)
  Signal Layer 1 w0.152: v3(85.725,86.106) 86.233,86.106 88.9,88.773 93.599,88.773 94.234,88.138 v6(94.234,87.884)
  Signal Layer 2 w0.152: v5(75.057,71.501) 78.232,74.676 78.232,76.327 80.137,78.232 82.804,78.232 83.312,78.74 83.312,84.201 85.217,86.106 v3(85.725,86.106)
  Bottom Layer w0.152: U13.25@93.98,86.924 93.98,87.63 v6(94.234,87.884)
ENABLE: C14.1 Q3.1 R9.1 U2.4 U3.1 U5.2 U6.5 | length 56.2
  Top Layer w0.152: C14.1@69.342,85.229 70.981,85.229 Q3.1@71.374,84.836 ; v5(72.541,85.241) 72.136,84.836 Q3.1@71.374,84.836 ; U6.5@72.955,90.424 72.48,90.424 72.136,90.08 72.136,88.9 72.002,88.766 71.546,88.766 71.442,88.662 71.442,86.939 R9.1@71.767,86.614 71.767,85.229 Q3.1@71.374,84.836
  Signal Layer 1 w0.152: v3(86.868,71.12) v6(87.884,71.12) ; v3(90.805,71.374) 90.805,72.263 91.161,72.619 95.069,72.619 v6(95.107,72.581)
  Signal Layer 2 w0.152: v5(72.541,85.241) 72.517,85.217 72.517,85.09 74.295,83.312 74.295,70.104 74.803,69.596 77.216,69.596 78.359,70.739 79.502,70.739 80.645,69.596 85.471,69.596 85.852,69.977 85.852,70.612 86.36,71.12 v3(86.868,71.12) v3@86.995,71.12 ; v6(87.884,71.12) 90.424,71.12 90.805,70.739 v2(90.805,69.469) ; 90.551,71.12 v3(90.805,71.374)
  Bottom Layer w0.152: U2.4@87.287,70.804 87.568,70.804 v6(87.884,71.12) ; U5.2@89.658,70.194 90.383,69.469 v2(90.805,69.469) ; v6(95.107,72.581) 94.932,72.581 94.869,72.517 95.17,72.517 95.266,72.421 U3.1@95.266,71.467
GND: BT1.2 C1.2 C3.2 C4.1 C5.2 C6.2 C7.2 C9.2 C12.1 C14.2 C15.2 C16.2 C17.2 C18.1 C19.2 C20.2 C21.2 C22.2 C23.2 C24.1 C25.1 C26.2 C27.2 C28.2 C29.2 C30.2 C31.2 C32.2 C33.2 C34.2 C35.2 C45.2 J1.3 J1.5 J1.9 P1.4 Q4.3 R1.2 R2.2 R6.2 R7.2 R8.1 S1. S1.1 S2. S2.1 S3. S3.1 U1.2 U2.5 U2.6 U2.13 U3.9 U4.2 U4.5 U5.3 U5.5 U6.2 U7.1 U8.5 U8.18 U8.35 U8.42 U9.2 U10.1 U11.4 U12.4 U13.5 U13.16 U13.29 U14.3 U14.5 U14.6 U14.7 U14.17 U19.1 U19.10 U19.21 U19.30 X1.1 X1.6 X1.7 XA1. XA1.5 XA2.2 XA2.3 XA2.4 XA4.1 XA4.3 XA4.4 XA4.13 Y2.3 Y2.4 | length 27.6
  Top Layer w0.152: C17.2@81.022,86.233 82.181,86.233 C21.2@82.296,86.348 ; X1.6@88.75,87.256 88.75,89.281 v7(89.662,89.281)
  Signal Layer 1 w0.152: v6(91.337,71.985) 91.821,71.501 92.583,71.501 92.837,71.755 94.615,71.755 95.504,70.866 95.504,69.643 95.402,69.542 95.402,69.113 95.197,68.908 v7(95.197,68.633)
  Signal Layer 2 w0.152: v7(95.197,68.633) 98.118,68.633 v2(98.171,68.58)
  Bottom Layer w0.152: U4.2@83.114,70.048 83.51,70.048 83.947,70.485 83.947,71.12 84.201,71.374 85.117,71.374 U2.6@85.687,70.804 ; U2.5@86.487,70.804 U2.13@86.487,72.644 ; U5.5@89.408,69.469 89.658,69.219 U5.3@89.658,68.744 89.683,68.719 C12.1@90.932,68.719 ; C29.2@90.932,89.293 C4.1@92.329,89.293 92.329,89.654 92.464,89.789 U1.2@93.594,89.789 ; v6(91.337,71.985) 91.337,72.033 v6@91.44,72.136 ; v7(95.197,68.633) 95.766,68.064 U3.9@95.766,67.217 ; v2(98.171,68.58) 98.327,68.424 98.327,68.158
  other v4: 89.874,76.92 90.974,76.92 89.874,78.02 90.974,78.02 92.33,82.424 93.43,82.424 94.53,82.424 95.63,82.424 92.33,83.524 93.43,83.524 94.53,83.524 95.63,83.524 92.33,84.624 93.43,84.624 94.53,84.624 95.63,84.624 92.33,85.724 93.43,85.724 94.53,85.724 95.63,85.724
NetC2_1: C2.1 U2.2 | length 1.2
  Bottom Layer w0.152: U2.2@88.327,72.644 89.531,72.644 C2.1@89.543,72.632
NetC2_2: C2.2 U2.3 | length 1.5
  Bottom Layer w0.152: U2.3@88.327,71.844 88.924,71.247 C2.2@89.543,71.247
NetC8_1: C8.1 U11.3 | length 4.1
  Top Layer w0.152: C8.1@87.249,74.307 90.158,74.307 90.612,73.853 U11.3@90.612,73.274
NetC8_2: C8.2 U11.5 | length 1.5
  Top Layer w0.152: C8.2@87.249,75.807 88.695,75.807 U11.5@88.712,75.824
NetC10_1: C10.1 R5.2 R8.2 U3.10 | length 8.2
  Signal Layer 2 w0.152: v2(94.488,69.215) 94.488,70.77 v2(94.735,71.017)
  Bottom Layer w0.152: C10.1@92.329,71.259 R8.2@93.726,71.259 94.476,71.259 94.718,71.017 v2(94.735,71.017) ; v2(94.488,69.215) 94.107,69.215 93.726,68.834 R5.2@93.726,68.719 94.589,68.719 94.715,68.593 94.715,68.433 94.997,68.15 95.158,68.15 95.266,68.042 U3.10@95.266,67.217
NetC11_1: C11.1 U3.8 | length 6.1
  Bottom Layer w0.152: C11.1@92.329,68.719 93.401,69.791 94.721,69.791 96.266,68.247 U3.8@96.266,67.217
NetC11_2: C11.2 U3.6 | length 7.4
  Bottom Layer w0.152: C11.2@92.329,70.219 92.757,70.647 94.422,70.647 94.535,70.534 95.455,70.534 97.266,68.723 U3.6@97.266,67.217
NetC13_1: C13.1 U3.4 | length 5.1
  Bottom Layer w0.152: U3.4@96.766,71.467 96.766,70.786 96.838,70.714 97.391,70.714 97.569,70.892 97.569,72.804 97.778,73.013 C13.1@99.06,73.013
NetC13_2: C13.2 U3.3 | length 4.3
  Bottom Layer w0.152: U3.3@96.266,71.467 96.266,70.786 96.592,70.46 97.497,70.46 97.823,70.786 97.823,71.28 98.056,71.513 C13.2@99.06,71.513
NetC16_1: C16.1 U8.43 | length 2
  Top Layer w0.152: U8.43@82.859,81.816 83.778,82.735 C16.1@84.455,82.735
NetC27_1: C27.1 L2.2 U10.4 XA1.1 | length 9.7
  Top Layer w0: L2.2@94.095,72.136 94.298,72.339 94.345,72.339 ; XA1.1@94.941,72.339 XA1.1@95.631,72.339
  Top Layer w0.254: U10.4@93.914,73.245 93.914,72.317 L2.2@94.095,72.136 ; 94.345,72.339 XA1.1@94.941,72.339 ; XA1.1@95.631,72.339 96.975,72.339 97.341,71.973 97.341,70.036 97.155,69.85 96.266,69.85 95.897,69.481 C27.1@95.897,68.072
NetC33_1: C33.1 U13.3 | length 6.3
  Bottom Layer w0.152: U13.3@96.83,84.724 98.313,84.724 98.679,85.09 98.679,89.039 C33.1@98.933,89.293
NetC34_1: C34.1 U13.6 Y2.1 | length 14.1
  Signal Layer 2 w0.152: v2(95.123,78.105) 97.663,78.105 99.314,79.756 99.314,83.185 v2(99.06,83.439)
  Bottom Layer w0.152: Y2.1@94.977,79.301 94.977,78.251 v2(95.123,78.105) ; U13.6@96.83,82.774 98.709,82.774 ; C34.1@99.06,81.395 99.06,82.423 98.709,82.774 ; v2(99.06,83.439) 99.06,83.125 98.709,82.774
NetC35_1: C35.1 U13.7 Y2.2 | length 14
  Signal Layer 2 w0.152: v2(95.25,76.708) 94.615,77.343 94.615,78.486 94.869,78.74 97.663,78.74 98.806,79.883 98.806,81.825 v2(98.507,82.124)
  Bottom Layer w0.152: C35.1@95.008,73.66 94.977,73.691 Y2.2@94.977,75.501 94.977,76.435 v2(95.25,76.708) ; U13.7@96.83,82.124 v2(98.507,82.124)
NetJ1_10: J1.10 R10.1 | length 2.6
  Top Layer w0.152: R10.1@68.961,103.62 69.151,103.81 J1.10@71.476,103.81
NetQ1_3: Q1.3 U4.8 | length 8.8
  Bottom Layer w0.152: Q1.3@69.469,69.85 70.485,70.866 72.392,70.866 72.773,71.247 76.158,71.247 76.707,70.698 U4.8@77.414,70.698
NetQ2_1: Q2.1 Q3.2 R9.2 S1.2 U7.2 | length 24.6
  Top Layer w0.152: U7.2@68.546,69.408 69.723,70.585 69.723,72.136 70.485,72.898 70.485,79.502 71.12,80.137 Q2.1@71.501,80.137 72.27,80.906 73.107,80.906 73.406,81.206 Q3.2@73.406,83.871 ; S1.2@68.859,83.69 73.225,83.69 Q3.2@73.406,83.871 ; R9.2@73.267,86.614 73.267,84.01 Q3.2@73.406,83.871